# Altium PCB Multimodal.PcbDoc (part 2 of 3)
Units mil, origin at the board's own origin, x right, y up, seen from the top; angles counter-clockwise.
Board outline 1182.8 x 2149.26 mil, 6 copper layers (L1_TOP, L2_GND, L3_Signal, L4_PWR, L5_GND, L6_BOTTOM), stack 44.646 mil thick; 156 components, 97 nets, 528 pads, 619 vias.
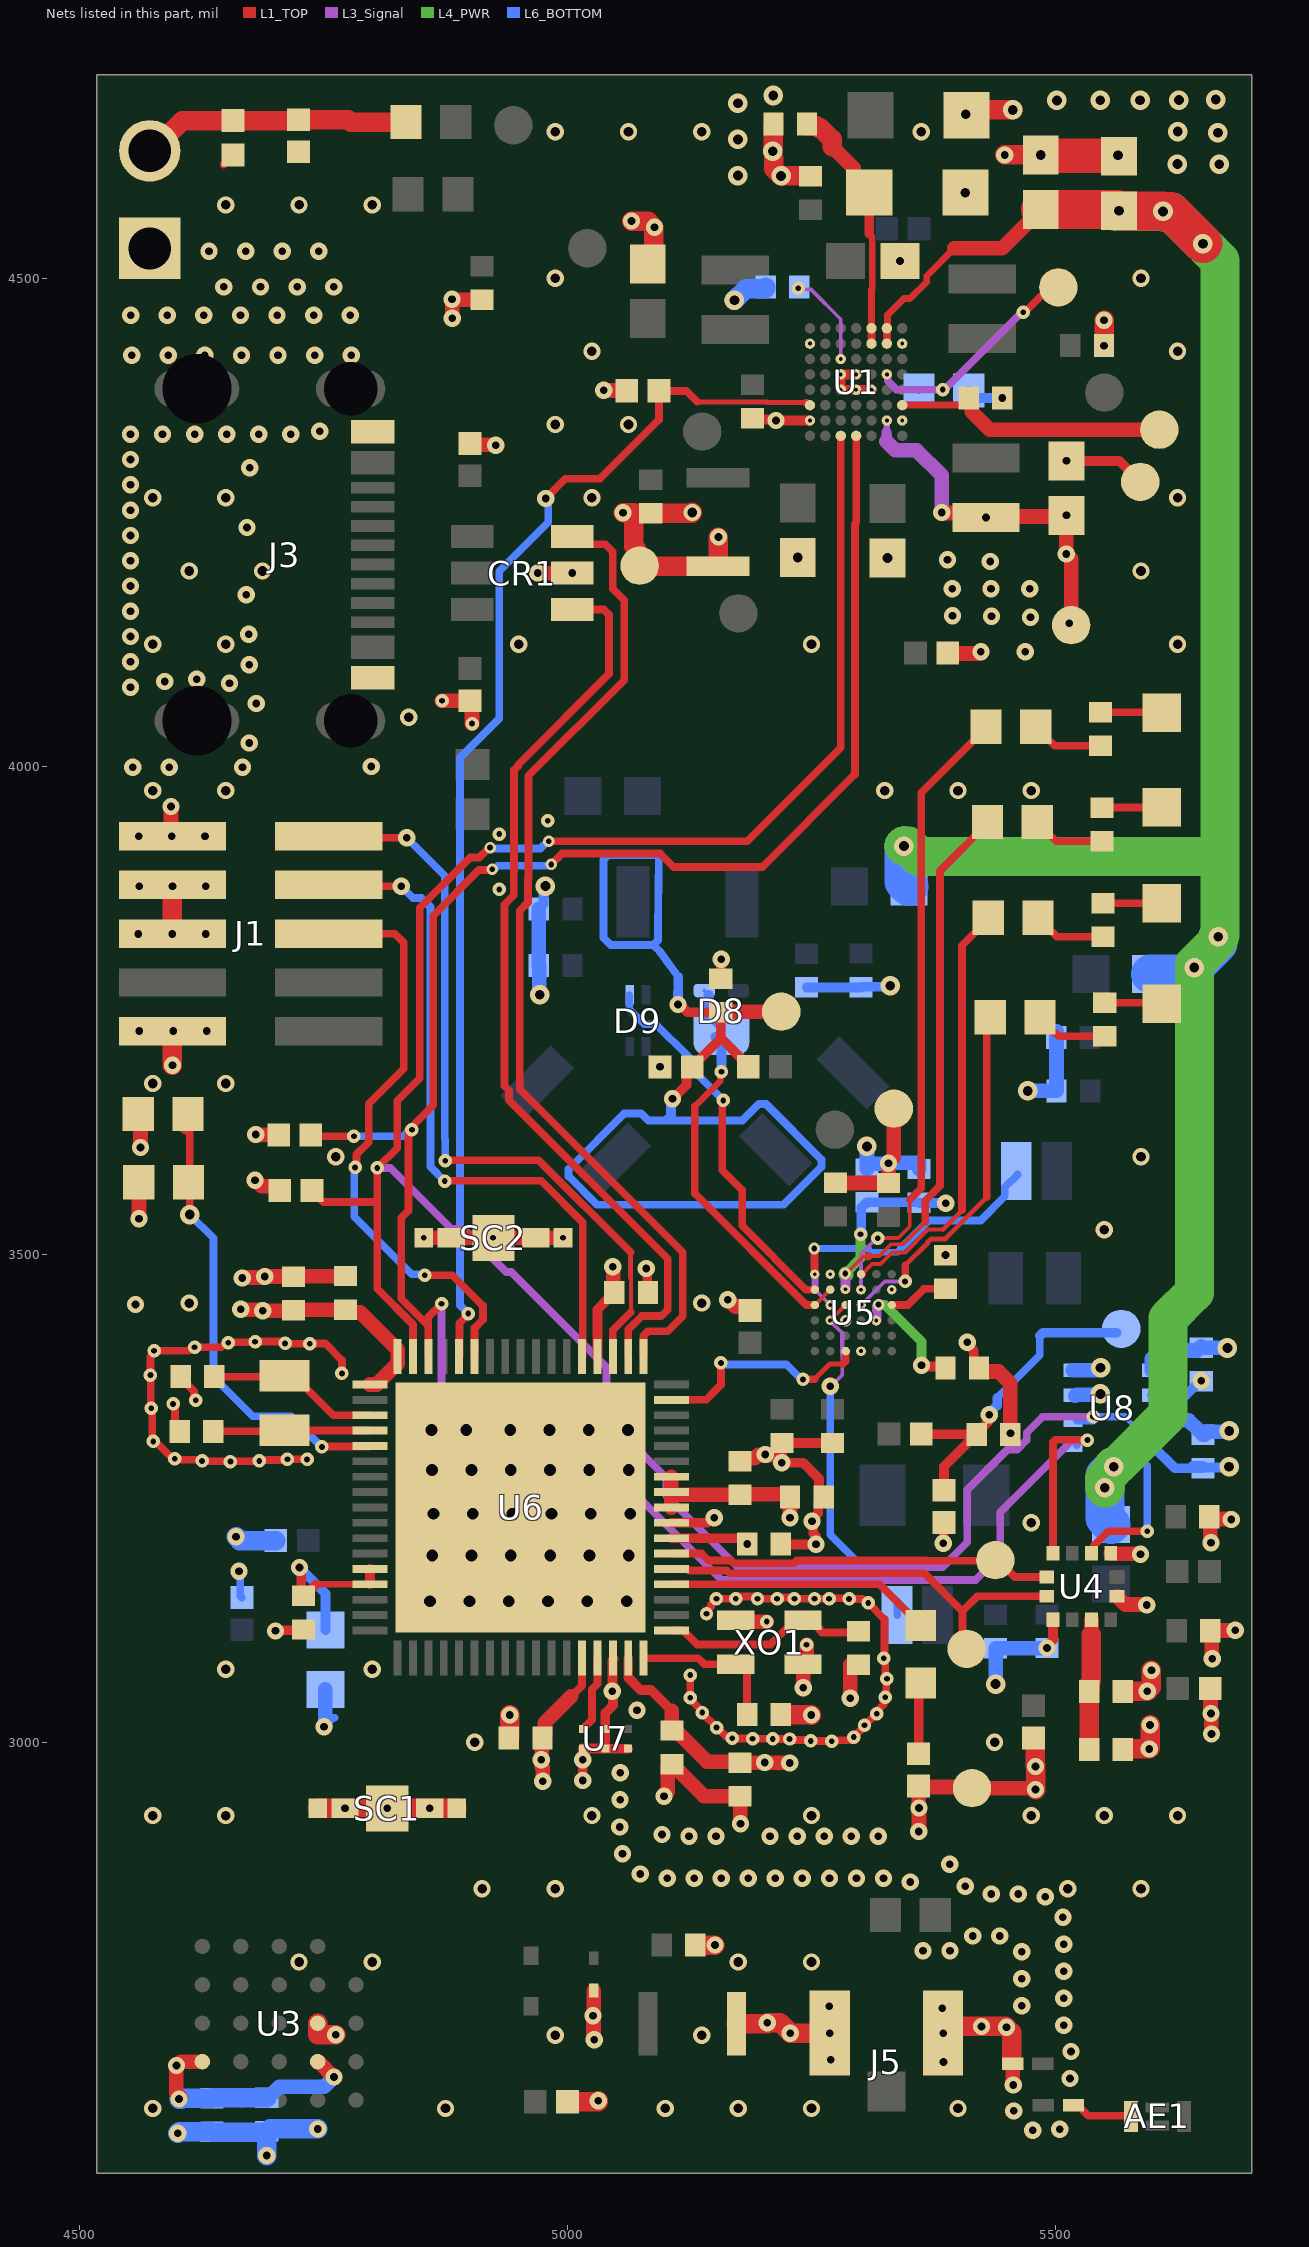
[diagram p6: the nets of this part, all layers, seen from the top]

## Via types
v1: diameter 17.72, hole 7.87, L1_TOP to L6_BOTTOM, tented both sides, 216 vias
v2: diameter 13.78, hole 5.91, L1_TOP to L6_BOTTOM, tented both sides, 93 vias
v3: diameter 17.72, hole 9.84, L1_TOP to L6_BOTTOM, 66 vias
v4: diameter 9.84, hole 3.94, L1_TOP to L2_GND, tented top, 49 vias
v5: diameter 20, hole 10, L1_TOP to L6_BOTTOM, tented both sides, 48 vias
v6: diameter 17.72, hole 7.87, L1_TOP to L6_BOTTOM, 46 vias
v7: diameter 9.84, hole 3.94, L2_GND to L3_Signal, tented top, 40 vias
v8: diameter 20, hole 12, L1_TOP to L6_BOTTOM, tented both sides, 30 vias
v9: diameter 11.81, hole 5.91, L3_Signal to L4_PWR, 20 vias
v10: diameter 11.81, hole 5.91, L1_TOP to L6_BOTTOM, tented both sides, 5 vias
v11: diameter 9.84, hole 3.94, L1_TOP to L2_GND, tented both sides, 3 vias
v12: diameter 17.72, hole 9.84, L1_TOP to L6_BOTTOM, tented both sides, 3 vias

## Nets (pads, with @x,y where several pads share a name; then routed paths per layer and width w, separated by ;. In a path a pad name is that pad's centre, name@x,y a point inside that pad or via, vN(x,y) a via of type N, cw(c..) or ccw(c..) an arc to the next point about the centre after c; other vN are vias at no path point) (continued)
3V3D: 3V3D.1 C2.1 C14.1 C16.1 C17.1 C35.1 C36.1 C37.1 C38.1 C40.1 C42.1 C43.1 C48.1 C49.1 C58.1 C60.1 C61.1 FB5.1 J1.01 L9.2 R6.2 R8.2 R9.2 R15.2 R19.2 R20.2 R24.2 R31.2 R32.2 R36.2 U1.B7 U3.B4 U3.E4 U5.C3 U5.C5 U6.1 U6.30 U6.33 U6.41 U6.43 U6.44 U6.45 U6.55 U6.68 U8.2 U8.6 U8.8 | length 2376.1
  L1_TOP w7: R20.2@4560.29,3643.59 R20.2@4562.63,3641.25
  L1_TOP w7.87: U3.B4@4744.04,2672.89 U3.B4@4745.03,2672.89 ; C35.1@4974.01,3004.1 C35.1@4976.91,3006.99
  L1_TOP w8: 5003.94,3047.24 5014.97,3058.28 U6.30@5014.97,3086.24
  L1_TOP w10: U6.55@5030.72,3395.05 5030.72,3443.49 5041.24,3454.01 5042.62,3454.01 5048.05,3459.45 C40.1@5048.05,3460.82 ; U6.33@5062.22,3086.24 5062.22,3066.45 5074.99,3053.67 5085.59,3053.67 5106.97,3032.29 ; U6.41@5106.39,3209.15 5178.6,3209.15 5184.03,3203.72 v1(5184.03,3203.1)
  L1_TOP w15: v1(4562.63,3609.34) R20.2@4562.63,3641.25 ; v1(4593.83,3958.67) 4593.83,3929.85 J1.01@4595.27,3928.4 ; v1@4603.9,2636.29 4599.36,2640.84 v1(4599.36,2668.95) 4600.09,2668.95 4604.03,2672.89 U3.E4@4625.73,2672.89 ; v1(4665.32,3443.63) 4665.84,3443.11 4686.24,3443.11 4686.65,3442.7 v1@4687.86,3442.7 ; v1(4679.86,3575.92) 4680.59,3575.92 4686.84,3569.67 4701.16,3569.67 4701.16,3569.48 R32.2@4705.27,3565.36 ; v1(4680.59,3622.64) 4680.84,3622.39 4703.8,3622.39 R31.2@4704.05,3622.14 ; v1(4687.86,3442.22) 4718.89,3442.22 C58.1@4719.37,3442.7 4719.67,3443 4772.43,3443 C37.1@4772.72,3443.3 4775.66,3440.36 4787.61,3440.36 4826,3401.98 4826,3388.13 4804.5,3366.63 U6.1@4797.57,3366.63 ; U3.B4@4745.03,2672.89 v1(4760.78,2657.14) ; v1@4973.02,2982.16 4973.73,2981.45 4973.73,2975.15 4974.7,2974.18 v1(4974.7,2960.03) ; v1(4973.21,2982.16) 4973.73,2982.68 4973.73,3003.82 C35.1@4974.01,3004.1 ; C35.1@4976.91,3006.99 4976.91,3020.21 5003.94,3047.24 ; v1(5037.12,4385.13) 5037.37,4384.88 5060.34,4384.88 R8.2@5060.59,4384.63 ; v1(5046.39,3487.19) 5046.91,3486.67 5046.91,3461.96 C40.1@5048.05,3460.82 ; U6.43@5106.39,3240.65 U6.44@5106.39,3256.4 ; U6.45@5106.39,3272.14 U6.44@5106.39,3256.4 ; 5106.97,3032.29 C43.1@5106.97,3012.09 5109.9,3009.16 5114,3009.16 5142.96,2980.2 C42.1@5175.18,2980.2 ; v1(5164.02,3453.5) 5164.75,3453.5 5171.82,3446.43 5182.68,3446.43 5186.8,3442.32 R24.2@5186.99,3442.32 ; C36.1@5176.75,3253.61 5109.18,3253.61 U6.44@5106.39,3256.4 ; C36.1@5176.75,3254.16 5218.56,3254.16 C2.1@5218.72,3254.33 ; C42.1@5177.22,2979.27 v1(5202.14,2979.27) 5202.36,2979.05 5227.34,2979.05 v1(5227.56,2978.83) ; v1(5227.9,3230.22) C2.1@5227.93,3251.16 ; v1(5383.25,4259.93) 5383.77,4259.41 5424,4259.41 v1(5428.7,4254.71) 5429.8,4255.82 5510.06,4255.82 C14.1@5510.85,4256.61 ; R9.2@5389.64,4115.75 5393.52,4115.75 5393.76,4115.51 5421.14,4115.51 5422.76,4117.14 v1(5423.5,4117.14) ; v1(5511.17,4256.93) C14.1@5510.85,4256.61 ; v1(5514.1,4146.32) 3V3D.1@5515.91,4144.51 5515.91,4212.3 v1(5510.85,4217.36) C14.1@5510.85,4256.61 ; R36.2@5658.29,3054.97 5658.76,3054.5 5658.76,3030.1 5659.53,3029.33 5659.53,3008.85 v1(5659.82,3008.56)
  L1_TOP w20: R6.2@4999.95,2631.85 5031.65,2631.85 v1(5031.65,2632.83)
  L3_Signal w7: 5327.07,4342.19 5327.07,4353.94 5327.02,4354 v4(5327.22,4354.19)
  L3_Signal w10: v9(5284.63,3480.32) 5284.72,3480.22 v7(5284.72,3464.16) ; 5326.86,4332.63 5326.86,4342.29
  L3_Signal w15: 5326.86,4332.63 5335.65,4323.84 5357.46,4323.84 5383.25,4298.04 v1(5383.25,4259.93)
  L4_PWR w10: v9(5284.63,3480.32) 5300.28,3495.97 v2(5300.28,3520.44)
  L4_PWR w15: v9@5285.01,3479.85 v9@5285.58,3479.27
  L6_BOTTOM w7.87: C16.1@4635.78,2635.44 C16.1@4635.78,2635.96 ; v1(4663.39,3175.2) 4664.86,3173.72 4664.86,3149.9 R19.2@4666.34,3148.43 ; v1@4751.97,3017.36 4759.76,3025.15 4761.37,3025.15
  L6_BOTTOM w10: v2(5300.28,3520.44) 5301,3521.17 5301,3547.78 5305.76,3552.54 C48.1@5306.74,3552.54 ; C48.1@5306.74,3553.22 5360.33,3553.22 C49.1@5360.33,3552.93 ; C49.1@5360.21,3552.93 C49.1@5360.33,3552.93 ; v1(5387.45,3552.23) 5387.1,3552.58 5360.68,3552.58 C49.1@5360.33,3552.93
  L6_BOTTOM w15: C17.1@4691.88,2635.96 4693.26,2635.96 4704.55,2647.25 4750.63,2647.25 4760.52,2657.14 v1(4760.78,2657.14) ; v1(4750.47,3015.86) v1@4751.36,3016.75 ; v1@4751.97,3017.36 v1@4751.36,3016.75 ; FB5.1@4751.97,3054.15 4751.97,3018.09 4750.99,3017.12 v1@4751.36,3016.75 ; U8.2@5520.29,3355.08 5521.17,3355.96 5544.96,3355.96 v5(5545.92,3356.91) ; U8.6@5598.42,3330.1 5636.16,3330.1 C61.1@5646.72,3319.54 ; U8.8@5598.42,3381.28 5598.42,3392.66 5607.21,3401.45 5644.9,3401.45 5649.21,3405.76 5650.78,3404.19 5675.85,3404.19 v5(5676.05,3403.99) ; C61.1@5651.03,3315.23 5652.53,3315.23 5655.34,3318.04 5677.07,3318.04 v5(5678.03,3319)
  L6_BOTTOM w20: v1(4602.1,2634.65) 4604.47,2634.65 4605.26,2635.44 C16.1@4635.78,2635.44 ; C16.1@4635.78,2635.96 C17.1@4691.88,2635.96 ; v1(4660.43,3210.63) 4664.37,3206.69 R15.2@4701.18,3206.69
  other v1: 5659.24,3029.62 4560.74,3928.22 4594.71,3928.22 4628.67,3928.22 5469,4117.38 5474.34,4152.57 5394.44,4154.24 5434.31,4153.74 5394.11,4181.76 5433.89,4181.76 5473.68,4181.76 5433.14,4209.79 5389.27,4211.62
  other v4: 5285.23,3432.13 5284.72,3464.16
  other v7: 5285.23,3432.13 5327.22,4354.19
  other v9: 5285.23,3432.13
5V_LED: C9.1 C10.1 FB1.2 FB2.2 FB3.2 U1.B1 U1.B2 | length 2369.7
  L1_TOP w7: U1.B1@5327.15,4448.63 5327.85,4449.32 5327.85,4462.07 5344.89,4479.11 5350.98,4479.11 5368.01,4496.15 5368.01,4502.24 5396.49,4530.72
  L1_TOP w8: U1.B2@5327.15,4432.88 U1.B1@5327.15,4448.63
  L1_TOP w15: 5396.49,4530.72 5445.32,4530.72 5472.4,4557.8 5473.98,4557.8 C10.1@5484.78,4568.6
  L1_TOP w40: C10.1@5484.78,4570.18 5563.62,4570.18 v5(5564.85,4568.95) 5609.42,4568.95 v5(5610.05,4568.33) 5617.89,4568.33 v5(5650.96,4535.25)
  L4_PWR w40: v5(5344.63,3918.18) 5349.5,3918.18 5360.22,3907.46 5668.44,3907.46 ; v5(5550.42,3260.76) 5550.42,3270.98 5559.56,3280.12 v5(5559.56,3282.35) ; v5@5562.18,4568.33 v5(5610.05,4568.33) 5610.69,4567.68 5618.54,4567.68 v5(5650.96,4535.25) 5668.44,4517.78 5668.44,3907.46 ; v5@5564.71,3285.27 5615.24,3335.8 5615.24,3434.14 5642.11,3461.02 5642.11,3797.22 5666.58,3821.69 v5(5666.58,3825.19) 5668.44,3827.06 5668.44,3907.46
  L6_BOTTOM w40: v5(5344.63,3918.18) 5344.63,3881.93 FB3.2@5349.73,3876.82 ; FB2.2@5556.95,3223.09 5550.42,3229.62 5550.42,3273.2 v5(5559.56,3282.35) ; FB1.2@5597.08,3786.99 5635.39,3786.99 5666.58,3818.18 v5(5666.58,3825.19)
  other v5: 5642.11,3793.72
ACC_INT1: 1.1 U4.5 U6.40 | length 397.3
  L1_TOP w7.87: U6.40@5106.39,3193.4 5137.59,3193.4 5144.76,3186.23 5167.53,3186.23 5170.34,3183.42 5232.14,3183.42 5234.95,3186.23 5367.14,3186.23 5367.31,3186.06 5437.74,3186.06 1.1@5438.37,3186.7 5440.82,3186.7 5458.09,3169.43 U4.5@5490.88,3169.43
ACC_INT2: 2.1 U4.6 U6.39 | length 449.1
  L1_TOP w7.87: U6.39@5106.39,3177.66 5106.47,3177.58 5122.82,3177.58 5124.4,3176 5163.29,3176 5166.1,3173.19 5365.71,3173.19 5404.57,3134.34 ; 2.1@5408.86,3095.82 5404.57,3100.11 5404.57,3134.34 ; U4.6@5490.88,3149.74 5419.98,3149.74 5404.57,3134.34
ACC_VREG_OUT: C51.1 C52.1 U4.9 | length 133.8
  L1_TOP w15: 5536.73,3110.34 U4.9@5536.73,3125.59
  L1_TOP w20: C52.1@5534.47,2992.73 C51.1@5534.47,3052.28 5534.91,3052.71 5534.91,3060.81 5536.73,3062.63 5536.73,3110.34
ADPD_INTR: U5.C1 U6.50 | length 232.4
  L1_TOP w5: 5253.02,3371.82 5268.88,3387.69 5282.02,3387.69
  L1_TOP w7.87: U6.50@5106.39,3350.89 5141.94,3350.89 5152.64,3361.58 5157.19,3366.13 v2(5157.19,3388.68) ; v2(5241.27,3371.82) 5253.02,3371.82 ; 5282.02,3387.69 5284.95,3390.61 U5.C1@5284.95,3400.78
  L6_BOTTOM w7.87: v2(5157.19,3388.68) 5158.7,3387.16 5224.08,3387.16 5239.43,3371.82 v2(5241.27,3371.82)
BAT+: C6.1 J4.2 U1.C1 U1.C2 | length 256.5
  L1_TOP w6: 5309.14,4545.37 5311.23,4543.28
  L1_TOP w7: 5311.23,4543.28 5312.19,4542.32 5312.19,4488.79 5311.4,4488.01 U1.C1@5311.4,4449.17
  L1_TOP w8: U1.C2@5311.4,4432.88 U1.C1@5311.4,4448.63
  L1_TOP w10: 5309.14,4545.37 J4.2@5309.14,4587.63
  L1_TOP w15: C6.1@5245.39,4658.05 5245.39,4656.67 C6.1@5248.32,4653.74 ; 5271,4634.8 5293.02,4612.78 5293.02,4603.75 5301.35,4595.42 J4.2@5306.34,4595.42
  L1_TOP w20: C6.1@5245.82,4656.24 5255.04,4656.24 5257.54,4653.74 5259.28,4653.74 5271,4642.02 5271,4634.8
BIA1: C21.2 J6.1 | length 64.1
  L1_TOP w7.87: C21.2@5546.05,4055.24 J6.1@5610.13,4055.24
BIA2: C22.2 J7.1 | length 62.8
  L1_TOP w7.87: C22.2@5547.58,3957.61 J7.1@5610.35,3957.61
BIA3: C25.2 J8.1 | length 60.3
  L1_TOP w7.87: C25.2@5548.52,3859.59 J8.1@5608.78,3859.59
BIA4: C27.2 J9.1 | length 64.7
  L1_TOP w7.87: C27.2@5550.37,3757.69 5608.5,3757.69 5610.13,3756.07 5613.33,3756.07 J9.1@5614.05,3756.79
BLUE_CO2: D5.1 U5.B3 U5.C4 | length 363.2
  L1_TOP w4: U5.B3@5269.2,3432.28 U5.C4@5284.95,3448.03
  L3_Signal w3.89: v1(5269.1,3364.89) 5269.84,3364.89 5281.42,3376.48 5281.42,3396.61
  L3_Signal w4: v4(5268.97,3432.28) 5268.97,3431.65 5280.92,3419.7 5281.42,3419.2
  L3_Signal w5: 5281.42,3396.61 5281.42,3419.2
  L6_BOTTOM w7.87: v1(5269.1,3364.89) 5269.1,3212.79 5337.65,3144.24 D5.1@5337.65,3130.46
  other v7: 5268.97,3432.28
BLUE_O2: D4.1 U5.A6 U5.B4 | length 313.1
  L1_TOP w4: v10(5252.72,3505.91) v10@5253.09,3505.54 ; U5.A6@5253.09,3479.89 U5.A6@5253.46,3479.52
  L1_TOP w7.87: U5.A6@5253.09,3479.89 v10@5253.09,3505.54
  L3_Signal w4: 5253.46,3463.7 5269.14,3448.02 v7(5269.2,3448.02)
  L3_Signal w7: 5253.46,3463.7 v7@5253.46,3479.52
  L6_BOTTOM w7: v10(5252.72,3505.91) 5307.72,3505.91 5311.59,3502.05 5337.57,3502.05 5341.43,3505.91
  L6_BOTTOM w7.87: 5341.43,3505.91 5370.15,3534.62 5423.2,3534.62 5448,3559.42 5448,3568.6 D4.1@5461.08,3581.68
  other v4: 5269.2,3448.02 5253.29,3479.54
  other v7: 5253.29,3479.54
BOOT0_MCU: R20.1 R21.2 U6.5 | length 470.6
  L1_TOP w7.87: R20.1@4606.45,3628.33 R20.1@4608.29,3626.48 ; v5(4613.13,3540.7) R20.1@4613.13,3641.74 ; v2(4748.39,3302.6) 4748.91,3303.12 4797.05,3303.12 U6.5@4797.57,3303.64
  L6_BOTTOM w7.87: v5(4613.13,3540.7) 4637.4,3516.44 4637.4,3373.98 4677.42,3333.96 4717.03,3333.96 v2(4748.39,3302.6)
DISP_LED: D13.2 U6.38 | length 272.9
  L1_TOP w7.87: U6.38@5106.39,3161.91 5319.64,3161.91 D13.2@5361.8,3119.74
EXCN: R39.2 U5.D4 | length 370.3
  L1_TOP w3.89: R39.2@5432.96,3741.28 R39.2@5432.96,3742.78
  L1_TOP w4: U5.D4@5300.7,3448.03 5300.77,3448.03 v7(5301.1,3448.36)
  L1_TOP w5: 5345.86,3488.58 5368.77,3511.49 5368.77,3512.06 5372.54,3515.83 5387.05,3515.83 5429.55,3558.33
  L1_TOP w7.87: v2(5345.86,3472.18) 5345.86,3488.58 ; 5429.55,3558.33 5429.55,3737.87 R39.2@5432.96,3741.28
  L3_Signal w3.89: v7(5301.1,3448.36) 5324.92,3472.18 v2(5345.86,3472.18)
  other v4: 5301.1,3448.36
EXCP: R17.2 U5.D5 | length 642.5
  L1_TOP w3.89: v2(5317.76,3516.38) 5318.12,3516.74 5338.87,3516.74 5350.58,3528.44 5350.58,3555.78 ; R17.2@5428.64,4038.83 R17.2@5428.64,4040.33
  L1_TOP w7.87: 5350.58,3555.78 5362.5,3567.69 5362.5,3972.68 R17.2@5428.64,4038.83
  L3_Signal w3.89: v7@5300.7,3463.78 5300.63,3463.84 5300.63,3500.5 5316.52,3516.38 v2(5317.76,3516.38)
  other v4: 5300.63,3463.73
  other v7: 5300.63,3463.73
GD_BIAS: C1.1 R1.1 R2.2 TP2.1 | length 335.8
  L1_TOP w10: R1.1@5362.49,3315.7 5418.3,3315.7 5430.83,3328.22 5430.83,3334.18 v1(5432.12,3335.46) ; R2.2@5385.82,3258.33 5385.82,3282.69 5411.66,3308.54 5413.9,3308.54 5419.33,3313.97 C1.1@5419.33,3315.35
  L6_BOTTOM w8: 5440.14,3352.96 5483.88,3396.69 5483.88,3416.5
  L6_BOTTOM w10: v1(5432.12,3335.46) 5432.12,3337.16 5440.14,3345.18 5440.14,3352.96 ; 5483.88,3416.5 5487.01,3419.63 TP2.1@5562.37,3419.63
GD_BIAS_2: C18.1 R12.1 R13.2 TP1.1 | length 1259.1
  L1_TOP w10: v1(5107.54,3659.25) 5121.79,3673.5 5121.79,3685.9 R13.2@5127.9,3692.02 ; v1(5113.23,3755.95) 5115.02,3755.95 5122.95,3748.02 C18.1@5157.02,3748.02 ; R13.2@5127.9,3692.21 5157.02,3721.33 ; C18.1@5157.29,3748.3 C18.1@5157.02,3748.02 ; R12.1@5185.11,3692.09 5178.5,3698.71 5178.5,3699.85 5157.02,3721.33 ; TP1.1@5218.66,3748.3 TP1.1@5218.93,3748.57 ; 5157.02,3721.33 C18.1@5157.02,3748.02
  L1_TOP w15: C18.1@5157.29,3748.3 TP1.1@5218.66,3748.3
  L6_BOTTOM w8: 5092.68,3829.38 5093.45,3908.89 5041.6,3908.89 5036.91,3904.21 5036.91,3824.27 5044.4,3816.78 5087.89,3816.78 ; 5092.79,3829.38 5092.58,3829.17 5092.58,3821.47 5087.89,3816.78 ; 5106.06,3642.86 5100.2,3637 ; 5113.41,3784.35 5094.91,3809.77 5087.89,3816.78 ; 5100.2,3637 5178.95,3637 5195.84,3653.89 5203.29,3653.89 5260.19,3596.99 5260.19,3589.54 5221.3,3550.65 5030.29,3550.65 5001.13,3579.81 5001.13,3587.27 5058.02,3644.16 5075.53,3644.16 5082.69,3637 5100.2,3637
  L6_BOTTOM w10: 5106.06,3642.86 5106.06,3657.77 v1(5107.54,3659.25) ; v1(5113.23,3755.95) 5113.41,3784.35
GND: C1.2 C2.2 C3.2 C4.2 C5.2 C6.2 C7.2 C8.2 C9.2 C10.2 C11.2 C12.2 C13.2 C14.2 C15.2 C16.2 C17.2 C18.2 C19.2 C20.2 C23.2 C24.2 C26.2 C28.2 C29.2 C30.2 C31.2 C32.2 C33.2 C34.2 C35.2 C36.2 C37.2 C38.2 C40.2 C41.2 C42.2 C43.2 C45.2 C46.2 C47.2 C48.2 C49.2 C50.2 C51.2 C52.2 C53.2 C54.2 C55.2 C56.2 C57.2 C58.2 C60.2 C61.2 C62.2 C64.2 CR1.2 CR3.2 D1.2 GND.1 J1.03 J1.05 J1.09 J2.1 J3.A1/B12 J3.B1/A12 J4.1 J5.2 J5.3 J11.2 L5.2 R2.1 R5.1 R7.1 R13.1 R21.1 R22.1 R28.1 R33.1 R38.1 SC1.S1-1 SC1.S1-2 SC1.S1-3 SC1.S1-4 SC1.S1-5 SC2.S1-1 SC2.S1-2 SC2.S1-3 SC2.S1-4 SC2.S1-5 SW1.1 SW2.1 U1.A2 U1.A7 U1.C5 U1.D4 U1.D5 U1.E4 U1.E5 U1.G2 U1.G7 U3.B3 U4.1 U4.7 U4.11 U5.B6 U5.D1 U5.F5 U6.32 U6.42 U6.69 U7.2 U7.4 U7.5 U7.6 U8.1 U8.5 U8.7 XO1.2 XO1.4 | length 5508.8
  L1_TOP w7.87: J2.1@4572.04,4530.37 J2.1@4580.37,4530.37 ; v2(4595.98,3346.65) 4597.89,3344.74 4597.89,3323.53 C46.2@4602.77,3318.65 ; C45.2@4603.77,3374.65 4603.77,3373.27 4617.34,3359.71 4617.34,3352.39 v2(4619.25,3350.48) ; D1.2@4647.82,4616.33 D1.2@4657.48,4625.98 ; v1(4700.79,3114.17) v1@4701.54,3114.92 ; C41.2@4728.58,3114.92 C41.2@4729.33,3115.67 ; v2(4733.2,3289.84) 4733.07,3289.97 4713.18,3289.97 v2(4713.05,3290.1) 4712.17,3289.22 4685.19,3289.22 4683.93,3287.96 4655.07,3287.96 v2(4654.69,3287.58) 4654.31,3287.96 4626.45,3287.96 4626.26,3287.77 4624.54,3289.49 4598.7,3289.49 v2(4597.55,3290.64) 4595.42,3290.64 4576.77,3309.29 4574.64,3309.29 4574.64,3341.34 4573.2,3342.78 4573.2,3375.82 v2(4572.76,3376.26) 4572.76,3394.85 4574.71,3396.8 4574.71,3400.42 4573.96,3401.17 4611.94,3401.17 4615.33,3404.56 4619.89,3404.56 4619.94,3404.61 4645.18,3404.61 4649.94,3409.36 v2(4652.5,3409.36) 4653.04,3409.9 4679.38,3409.9 4680.04,3410.56 4706.11,3410.56 4708.02,3408.65 v2(4710.73,3408.65) 4710.9,3408.48 4735.69,3408.48 v2(4735.86,3408.31) 4736.21,3408.65 4751.7,3408.65 4768.95,3391.41 v2(4768.95,3377.92) ; R28.1@4900,4330.54 R28.1@4901.87,4332.4 ; C35.2@4939.97,3004.46 C35.2@4940.77,3005.27 ; v1@5026.69,2695.94 v1(5027.3,2695.32) ; v1@5026.69,2718.02 5025.44,2719.27 v1@5026.97,2720.81 ; CR3.2@5026.97,2745.61 CR3.2@5027.05,2745.69 ; U6.32@5046.47,3086.24 U6.32@5047.35,3085.36 ; v2(5125.76,3068.95) 5125.76,3044.26 5138.05,3031.98 v2(5138.05,3030.46) ; v2@5138.23,3030.28 5138.23,3029.93 5152.69,3015.46 v2(5152.69,3015.11) 5153.34,3015.11 5162.46,3006 5167.05,3006 5169.08,3003.97 5189.41,3003.97 v2(5189.63,3003.75) ; v2(5142.42,3131.72) 5142.42,3134.28 5146.91,3138.77 5146.91,3141.08 5152.98,3147.15 v2(5172.47,3147.15) ; v2@5172.42,3149.26 5172.53,3149.37 v2@5194.49,3149.37 ; v2@5189.68,3003.8 5189.84,3003.64 5210.06,3003.64 v2(5210.17,3003.53) 5227.5,3003.47 5228.53,3002.43 5248.1,3002.43 5249.19,3001.34 5270.61,3001.34 v2(5270.72,3001.23) 5271.63,3002.15 5290.02,3002.15 5304.27,3016.4 v2(5304.27,3017.63) 5304.7,3017.63 5316.54,3029.46 5317.33,3029.46 5317.33,3032.38 5323.77,3038.82 5323.77,3044.45 5326.4,3047.08 5326.4,3064.45 v2(5327.22,3065.27) 5325.63,3066.86 5325.63,3084.56 v2(5324.05,3086.15) 5324.68,3086.78 5324.68,3126.28 v2(5308.09,3142.87) 5306.01,3142.87 5301.94,3146.93 v2(5288.44,3146.93) 5287.84,3147.53 5269.32,3147.53 5268.35,3148.51 v2@5268.12,3148.29 ; v2(5194.66,3147.15) v2(5214.66,3147.15) ; v2@5215.18,3148.35 5231.94,3148.35 v2@5232.47,3147.83 ; v2(5232.47,3147.15) v2(5253.01,3147.15) ; XO1.4@5241.05,3071.58 5241.05,3082.57 XO1.4@5244.94,3086.46 ; v2@5252.71,3148.13 5253.7,3147.15 v2(5267.97,3147.15)
  L1_TOP w10: R21.1@4560.78,3573.85 R21.1@4561.05,3573.59 ; v1@4701.54,3114.92 C41.2@4728.58,3114.92 ; C37.2@4772.43,3477.41 C37.2@4772.72,3477.71 ; v1(5015.51,2960.88) 5015.57,2960.94 5015.57,2982.1 v1(5015.63,2982.16) 5015.63,2993.68 U7.5@5038.78,2993.68 ; v1(5045.87,3052.36) 5046.54,3051.68 5046.54,3037.94 5038.78,3030.18 5038.78,2993.48 U7.6@5061.89,2993.48 ; v1@5046.17,3052.66 5046.17,3084.18 U6.32@5047.35,3085.36 ; v1(5080.73,3485.35) 5081.59,3484.48 5081.59,3461.69 C40.2@5082.46,3460.82 ; U6.42@5106.39,3224.9 5143.29,3224.9 5148.39,3230 v1(5150.48,3230) ; C18.2@5157.02,3782.43 5157.2,3782.61 5157.2,3802.11 v1(5157.37,3802.28) ; C11.2@5189.74,4356.35 5190.84,4355.25 5212.44,4355.25 v1(5213.55,4354.14) v4(5248.41,4354.14) ; C38.2@5218.44,3203.1 5218.77,3202.77 v1@5254.26,3202.77 ; C47.2@5219.62,3306.73 5219.62,3288.74 v1(5219.62,3286.53) 5241.27,3286.53 5257.76,3270.04 5257.76,3247.02 5257.98,3246.8 5256.93,3245.76 5256.93,3235.07 5250.38,3228.52 v1(5250.38,3226.43) 5251.85,3224.95 5251.85,3213.69 5254.46,3211.08 5254.46,3203.09 v1(5254.59,3202.96) ; C47.2@5219.62,3306.73 C31.2@5271.46,3306.71 ; C29.2@5274.54,3573.15 C29.2@5274.62,3573.06 ; v4(5295.66,4401.39) v4(5279.91,4401.39) v4(5279.91,4385.64) v4(5295.66,4385.64) v4(5311.4,4385.64) ; C34.2@5328.85,3573.06 C34.2@5328.93,3572.98 ; v1(5385.06,3204.05) 5385.44,3204.42 5385.44,3224.7 R2.1@5385.82,3225.08 ; C24.2@5387.02,3498.96 5387.19,3499.14 v1(5387.19,3499.31) ; v1(5409.53,3409.98) 5409.53,3407.89 5416.18,3401.24 5416.18,3389.12 C23.2@5421.61,3383.69 ; C1.2@5453.74,3315.35 v1(5453.74,3316.73) ; v1(5491.28,3096.6) 5491.28,3098.69 5497.36,3104.77 U4.7@5497.36,3125.59 ; v1(5511.17,4312.75) 5565.3,4312.75 GND.1@5586.79,4291.27 GND.1@5592.86,4291.27
  L1_TOP w15: v1(4561.05,3536.41) R21.1@4561.05,3573.59 ; v1(4666.77,3475.7) 4667.29,3476.22 4688.1,3476.22 4689.15,3477.27 v1(4689.89,3477.27) 4689.97,3477.19 4719.29,3477.19 C58.2@4719.37,3477.11 ; C58.2@4719.67,3477.41 C37.2@4772.43,3477.41 ; v2(4852.65,3516.81) 4852.7,3516.76 4880.72,3516.76 SC2.S1-4@4880.81,3516.76 SC2.S1-4@4880.81,3516.76 4923.54,3516.76 v2(4923.63,3516.85) 4967.42,3516.85 4967.51,3516.76 SC2.S1-1@4995.38,3516.76 4995.38,3516.85 v2(4995.51,3516.85) ; v2(4871.49,4067) R33.1@4900,4067 4902.2,4064.8 v2(4902.2,4043.64) ; v1(4881.59,4478.34) 4881.82,4478.1 4881.82,4459.04 v1(4882.05,4458.8) 4882.05,4477.72 4882.21,4477.87 C62.2@4912.4,4477.87 ; R28.1@4901.87,4332.4 4901.87,4331.7 4904.31,4329.25 4925.87,4329.25 v1(4926.39,4328.73) ; v1(4969.49,4197.83) v1(5004.92,4197.83) ; v1@5026.69,2695.94 v1@5026.69,2718.02 ; v1@5026.97,2720.81 CR3.2@5026.97,2745.61 ; v1(5065.47,4558.54) v1@5065.99,4558.02 ; C13.2@5081,4522.98 5084.74,4526.72 C13.2@5088.52,4526.72 ; v1@5088.3,4552.18 v1(5089.04,4552.18) v1@5088.52,4551.66 ; v1(5098.95,2944.8) 5098.95,2945.53 5102.66,2949.24 5102.66,2974.75 5111.28,2974.75 5111.28,2973.37 5139.85,2944.8 C42.2@5175.03,2944.8 ; C43.2@5106.97,2977.69 C43.2@5108.35,2977.69 ; C36.2@5176.75,3288.02 5179.68,3290.95 5191.9,3290.95 5195.38,3294.43 5201.92,3294.43 v1(5202.44,3294.95) 5202.96,3294.43 5213.92,3294.43 5219.62,3288.74 v1@5221.03,3287.32 ; C42.2@5176.92,2944.8 5177.08,2944.64 5177.08,2916.74 v1(5177.23,2916.59) ; XO1.2@5179.65,3123.7 v2(5204.03,3123.7) ; v1(5241.38,3055.8) XO1.4@5241.38,3079.88 ; XO1.4@5244.94,3086.46 v2(5244.94,3100.01) ; C29.2@5274.62,3573.06 C34.2@5328.85,3573.06 ; v1(5289.66,3045.22) 5289.66,3079.38 C19.2@5298.11,3079.38 ; C34.2@5328.93,3572.98 5328.93,3593.91 5334.26,3599.25 GND.1@5334.26,3649.21 ; R22.1@5359.63,2955.3 R22.1@5359.88,2955.05 ; v1(5359.94,2908.73) 5360.03,2908.83 5360.03,2932.74 v1(5360.13,2932.84) 5359.88,2933.09 R22.1@5359.88,2955.05 ; GND.1@5413.32,2954.41 5413.11,2954.19 5360.74,2954.19 R22.1@5359.88,2955.05 ; GND.1@5414.38,2953.09 5479.48,2953.09 5480.35,2953.09 v1@5481.41,2954.14 ; C23.2@5421.61,3383.69 5421.61,3382.8 5424.55,3379.87 5441.86,3379.87 5453.74,3367.98 v1(5453.74,3316.73) ; L5.2@5456.3,2670.27 5456.3,2649.32 v1(5456.65,2648.97) ; U4.1@5556.41,3193.59 5556.89,3193.11 5586.43,3193.11 v1(5586.95,3192.59) ; U4.11@5562.88,3149.74 5571.48,3141.15 5593.02,3141.15 v1(5593.54,3140.63) ; v1(5659.29,3204.33) 5659.29,3205.07 5658.53,3205.82 5658.53,3229.9 C53.2@5657.34,3231.1 5659.66,3228.78 5679.55,3228.78 v1(5680.07,3228.26) ; v1(5660.39,3085.58) 5659.87,3086.1 5659.87,3112.93 C50.2@5658.44,3114.36 5658.64,3114.56 5683.87,3114.56 v1(5684.07,3114.76)
  L1_TOP w20: v1(4595.27,3693.55) J1.09@4595.27,3728.4 ; J1.05@4595.27,3828.4 J1.03@4595.27,3878.4 ; U3.B3@4744.04,2712.26 4744.04,2700.44 v1(4762.68,2700.44) ; SC1.S1-5@4744.16,2932.39 v1(4772.12,2932.39) v1(4815.42,2932.39) v1(4858.73,2932.39) SC1.S1-1@4886.68,2932.39 ; C35.2@4940.77,3005.27 v1(4940.77,3028.06) ; v1(5056.88,4259.74) 5057.01,4259.61 5067.86,4259.61 ; v1@5065.99,4558.02 5082.46,4558.02 v1@5088.3,4552.18 ; GND.1@5073.9,4205.43 5070.2,4209.13 5070.2,4222.83 5067.86,4225.17 5067.86,4259.17 C7.2@5085.29,4259.17 ; C7.2@5086.17,4259.17 5127.05,4259.17 v12(5127.81,4259.94) ; GND.1@5086.6,4204.85 SW1.1@5154.18,4204.85 ; C13.2@5088.52,4526.72 v1@5088.52,4551.66 ; C26.2@5130.89,2792.39 v1(5151.09,2792.39) ; SW1.1@5154.64,4208.23 v1(5154.64,4234.71) ; SW2.1@5173.14,2711.88 v1@5204.63,2711.88 ; v1(5204.63,2712.86) 5217.56,2712.86 v1(5228.28,2702.14) v1(5268.66,2702.14) ; v5@5210.36,4633.61 5210.55,4633.8 5210.55,4657.62 C6.2@5210.98,4658.05 ; v5@5211.47,4622.11 5211.47,4611.95 v5(5218.76,4604.66) 5248.54,4604.66 C8.2@5248.87,4604.33 ; C20.2@5218.52,3028.51 5249.85,3028.51 v1(5249.85,3027.99) ; v1(5384.8,2702.14) 5391.67,2709.01 v1(5424.17,2709.01) 5448.78,2709.01 v1(5449.76,2708.02) 5455.02,2702.77 5455.02,2671.56 L5.2@5455.95,2670.62 L5.2@5456.3,2670.27 ; J11.2@5408.93,4666.9 5414.36,4672.33 v5(5456.14,4672.33) ; v1(5448.01,4626.22) 5484.57,4626.22 v5(5484.78,4626) ; R38.1@5477.51,3004.5 5477.71,3004.5 5479.32,3002.88 5479.32,2975.44 v1(5479.48,2975.29) 5479.48,2953.09 v1(5479.48,2951.66) ; v1(5549.62,4430.8) v1(5549.62,4456.91) ; C52.2@5568.88,2992.73 5568.88,2992.79 5569.32,2993.22 v1(5595.97,2993.22) 5596.77,2994.02 v1(5596.77,3017.8) ; C51.2@5568.88,3052.28 v1(5594,3052.28) 5598.19,3056.46 v1(5598.19,3073.71)
  L1_TOP w35: v5(5484.78,4626) 5485.4,4625.39 C9.2@5564.23,4625.39 ; v5(5563.91,4625.92) 5563.91,4625.71 C9.2@5564.85,4624.78
  L6_BOTTOM w10: C56.2@4970.65,3853.85 4975.53,3858.72 4975.53,3875.29 v5(4977.44,3877.2) ; C55.2@5245.04,3773.66 5245.34,3773.36 5300.53,3773.36 5300.84,3773.06 5301.9,3774.12 5329.63,3774.12 v5(5330.69,3775.18) ; R7.1@5411.13,4384.73 5418.66,4377.21 v1(5445.47,4377.21) ; v5(5471.48,3667.28) v5@5471.57,3667.37 ; C28.2@5497.02,3667.37 C28.2@5497.11,3667.46 ; U8.5@5598.42,3304.51 5622.12,3280.82 C61.2@5651.03,3280.82 ; U8.7@5598.42,3355.69 5633.55,3355.69 5647.83,3369.97 C60.2@5649.21,3369.97 v1(5649.18,3370.3) ; C61.2@5640.24,3283.04 5651.1,3283.04 5652.55,3281.59 5676.98,3281.59 v5(5677.76,3282.37)
  L6_BOTTOM w15: C56.2@4970.65,3853.85 C57.2@4970.65,3795.88 4971.17,3795.36 4971.17,3766.35 v5(4971.69,3765.83) ; C48.2@5306.74,3587.63 C48.2@5306.74,3592.75 ; v5(5306.74,3610.49) C48.2@5306.74,3592.75 ; v1@5328.53,3593.87 5360.21,3593.87 C49.2@5360.21,3587.34 ; v1@5329.24,3592.75 C48.2@5306.74,3592.75 ; v5(5438.59,3059.75) C33.2@5438.59,3096.46 5438.66,3096.53 5491.21,3096.53 v1(5491.28,3096.6) ; v5@5471.57,3667.37 C28.2@5497.02,3667.37 ; C28.2@5500.99,3667.46 C30.2@5500.99,3728.38 ; U8.1@5517.71,3381.28 5542.21,3381.28 5544.77,3383.84 v5(5546.12,3383.84)
  L6_BOTTOM w20: v1(4600.79,2599.66) 4602.17,2601.04 C16.2@4635.78,2601.04 4636.21,2600.6 C17.2@4691.91,2600.6 ; v1(4691.91,2576.7) C17.2@4691.88,2601.55 4693.22,2601.52 4695.7,2603.99 v1(4744.23,2603.99) ; v5(5170.95,4477.36) 5182.6,4489.01 5202.48,4489.01 5202.91,4489.45 C64.2@5202.91,4490.83
  other v1: 5385.19,2672.51 5269.55,2674.71 5026.07,2719.91 5383.93,2727.58 5268.29,2729.78 4557.52,3448.47 5328.93,3593.18 5094.83,3692.02 4561.42,3728.81 4596,3728.81 4630.57,3728.81 4560.39,3828.08 4594.97,3828.08 4629.55,3828.08 4561.18,3877.12 4595.36,3877.12 4629.55,3877.12 4554.5,3999 4592,3999 4667,3999 4798.95,3999.59 4673.87,4023.71 4681.28,4064.31 4552.33,4081 4653.76,4084.89 4587.55,4086.68 4620.21,4089.14 4674.1,4103.93 4552.33,4106.9 4552.33,4132.8 4673.51,4135.1 4552.33,4158.7 4671,4175.72 4552.33,4184.6 4552.33,4210.5 4552.33,4236.4 4671.75,4244.52 4552.33,4262.3 4552.33,4288.2 4674.49,4305.59 4552.33,4314.1 4552.33,4340 4585.17,4340 4618,4340 4650.83,4340 4683.67,4340 4716.5,4340 4746.11,4343.23 4553.5,4421 4591,4421 4628.5,4421 4666,4421 4703.5,4421 4741,4421 4778.5,4421 4552.5,4462 4590,4462 4627.5,4462 4665,4462 4702.5,4462 4740,4462 4777.5,4462 4648,4491 4685.5,4491 4723,4491 4760.5,4491 5340.7,4517.54 4632.75,4527.5 4670.25,4527.5 4707.75,4527.5 4745.25,4527.5
  other v2: 5249.08,3001.45 5227.55,3003.42 5168.86,3004.18 5293.27,3005.44 5316.69,3029.18 5125.76,3045.78 5325.58,3046.26 5152.58,3147.15 4625.7,3288.34 4684.31,3288.34 4575.64,3308.29 4573.64,3342.34 4576.52,3401.17 4617.98,3404.65 4679.91,3410.43 4930.09,3873.76 4930.09,3930.51 4979.72,3944.17
  other v3: 4575,2625 4875,2625 5100,2625 5175,2625 5250,2625 5400,2625 4987.5,2700 5137.5,2700 4725,2775 4800,2775 5175,2775 5250,2775 4912.5,2850 4987.5,2850 5512.5,2850 5587.5,2850 4575,2925 4650,2925 5025,2925 5250,2925 5475,2925 5550,2925 5625,2925 4904.93,3000 5437.5,3000 4650,3075 4800,3075 5475,3225 4612.5,3450 5137.5,3450 5550,3525 4762.5,3600 5587.5,3600 4575,3675 4650,3675 4575,3975 4650,3975 5325,3975 5400,3975 5475,3975 4837.5,4050 4575,4125 4650,4125 4950,4125 5250,4125 5625,4125 4612.5,4200 4687.5,4200 5587.5,4200 4575,4275 4650,4275 5025,4275 5625,4275 4987.5,4350 5062.5,4350 5025,4425 5625,4425 4987.5,4500 5587.5,4500 4650,4575 4725,4575 4800,4575 4987.5,4650 5062.5,4650 5137.5,4650 5362.5,4650
  other v4: 5342.9,4354.14 5248.41,4432.88 5342.9,4432.88
  other v5: 5327.72,4213.3 5235.85,4213.79 5174.57,4605.02 5624.82,4616.79 5667.58,4616.66 5210.36,4630.01 5174.57,4642.03 5666.27,4648.92 5625.08,4650.1 5174.57,4679.04 5501.4,4681.98 5545.73,4682.11 5586.52,4682.24 5626.4,4682.37 5664.17,4682.89 5210.87,4687.07
  other v6: 5476.6,2602.58 5504.29,2603.75 5457.28,2622.45 5514.82,2655.63 5515.81,2683.33 5508.44,2710.05 5465.32,2730.04 5508.44,2737.76 5465.32,2757.76 5508.44,2765.48 5465.32,2785.48 5364.16,2786.45 5391.88,2786.45 5508.44,2793.2 5415.08,2801.62 5442.79,2801.62 5507.5,2820.9 5489.41,2841.9 5434.13,2844.74 5461.84,2844.74 5407.55,2852.61 5351.23,2856.94 5102.04,2860.72 5129.75,2860.72 5157.47,2860.72 5185.19,2860.72 5212.9,2860.72 5240.62,2860.72 5268.33,2860.72 5296.05,2860.72 5323.77,2860.72 5074.66,2865.05 5391.56,2875.25 5056.26,2885.78 5124.39,2903.84 5152.11,2903.84 5207.54,2903.84 5235.26,2903.84 5262.97,2903.84 5290.69,2903.84 5318.41,2903.84 5096.74,2905.7 5053.67,2913.38 5053.88,2941.09 5054.08,2968.81 5071.23,3032.88
  other v8: 4859.23,3144.48 4899.51,3144.48 4939.79,3144.48 4980.08,3144.48 5020.36,3144.48 5060.65,3144.48 4861.39,3191.31 4901.67,3191.31 4941.96,3191.31 4982.24,3191.31 5022.53,3191.31 5062.81,3191.31 4862.72,3234.24 4903.01,3234.24 4943.29,3234.24 4983.58,3234.24 5023.86,3234.24 5064.15,3234.24 4861.26,3278.95 4901.55,3278.95 4941.83,3278.95 4982.11,3278.95 5022.4,3278.95 5062.68,3278.95 4860.66,3320.02 4896.28,3320.02 4941.23,3320.02 4981.52,3320.02 5021.8,3320.02 5062.09,3320.02
  other v11: 5300.7,3400.78 5332.2,3463.78 5269.2,3479.52
  other v12: 5407.57,4587.63 5408.15,4667.97
GREEN: D8.1 D8.3 U5.A4 U5.B5 | length 424.2
  L1_TOP w4: U5.A4@5253.46,3448.03 U5.B5@5269.2,3463.78
  L1_TOP w7: 5130.44,3651.64 5156.47,3677.67 5156.47,3685.92 v2(5157.65,3687.09)
  L1_TOP w7.87: 5130.44,3651.64 5130.44,3562.32 5244.73,3448.03 U5.A4@5253.46,3448.03
  L6_BOTTOM w4: D8.1@5140.13,3770.12 D8.1@5144.46,3765.79 ; D8.3@5144.46,3741.97 D8.3@5157.65,3728.78 D8.3@5151.34,3722.48
  L6_BOTTOM w10: D8.3@5144.46,3741.97 D8.1@5144.46,3765.79 ; D8.3@5151.34,3722.48 5157.65,3716.17 v2(5157.65,3687.09)
HSE_IN: C19.1 U6.35 XO1.1 | length 216
  L1_TOP w7.87: U6.35@5106.39,3114.66 5118.31,3114.66 5132.73,3100.24 5207.9,3100.24 5224.53,3116.87 5224.53,3117.03 5231.04,3123.54 XO1.1@5247.28,3123.54 ; XO1.1@5241.38,3124.88 5250.38,3124.88 5258.22,3117.03 5258.22,3115.06 5260.75,3112.53 C19.1@5294.54,3112.53
HSE_OUT: C20.1 U6.34 XO1.3 | length 153.7
  L1_TOP w7.87: U6.34@5077.96,3086.24 5133.98,3086.24 5140.35,3079.88 5176.02,3079.88 5183.87,3072.03 C20.1@5183.87,3030.14
I2C1_SCL: R31.1 U1.D8 U4.4 U6.66 U8.4 | length 2560.4
  L1_TOP w7.87: R31.1@4737.12,3622.14 4738.3,3620.97 v2(4781.17,3620.97) ; v2(4840.6,3627.46) v2@4838.83,3629.23 ; U6.66@4857.49,3395.05 4857.49,3426.86 ; v2(4870.97,3449.25) 4857.49,3435.77 4857.49,3426.86 ; v10(4922.84,3894.31) 4922.18,3893.65 4909.14,3893.65 4862.39,3846.9 4862.39,3652.79 v2@4838.83,3629.23 ; v10(4983.24,3899.41) 4994.36,3910.52 5094.86,3910.52 5108.73,3896.65 5199.51,3896.65 5294.44,3991.58 5294.44,4248.07 5295.66,4249.29 U1.D8@5295.66,4338.39 ; U4.4@5497.36,3193.59 5497.36,3307.55 5499.89,3310.08 5532.23,3310.08 v2(5532.62,3309.68) ; v2@4838.83,3629.23 4837.06,3627.46 4837.06,3544.64 4829.8,3537.38 4829.8,3454.55 4857.49,3426.86
  L3_Signal w7.87: v2(4870.97,3449.25) 4870.97,3356.31 4970.9,3356.31 5002.35,3324.87 5002.35,3313.79 5015.66,3300.48 5026.55,3300.48 5042.54,3284.49 5042.54,3273.41 5055.16,3260.79 5063.28,3260.79 5157.67,3166.4 5418.2,3166.4 5443.19,3191.39 5443.19,3235.77 5516.07,3308.64 5531.58,3308.64 v2(5532.62,3309.68)
  L6_BOTTOM w7.87: v2(4781.17,3620.97) 4831.54,3620.97 4838.04,3627.46 v2(4840.6,3627.46) ; v10(4922.84,3894.31) 4924.87,3894.31 4928.53,3897.98 4981.81,3897.98 v10(4983.24,3899.41) ; U8.4@5521.65,3304.51 5521.65,3305.49 5525.4,3309.24 5532.18,3309.24 v2(5532.62,3309.68)
I2C1_SDA: R32.1 U1.E8 U4.2 U6.67 U8.3 | length 2689.3
  L1_TOP w7.87: R32.1@4738.35,3565.36 4738.35,3565.17 4749.96,3553.55 4803.08,3553.55 4805.13,3555.61 ; U6.67@4841.74,3395.05 4841.74,3428.06 4805.13,3464.67 4805.13,3555.61 ; v10(4920.74,3916.63) 4919.67,3916.63 4909.49,3906.45 4900.31,3906.45 4848.78,3854.92 4848.78,3680.39 4825.48,3657.09 4825.48,3608.81 v2(4805.13,3588.46) 4805.13,3555.61 ; v10(4980.82,3923.17) 5184.07,3923.17 5279.91,4019.01 U1.E8@5279.91,4338.39 ; U4.2@5536.73,3193.59 5539.29,3196.15 5539.29,3201.6 5553.88,3216.19 v2(5594.01,3216.19)
  L3_Signal w7.87: v2(4805.13,3588.46) 4818.53,3588.46 4880.94,3526.05 4893.06,3526.05 4937.27,3481.84 4942.49,3481.84 5039.96,3384.37 5039.96,3316.46 5059.31,3297.11 5075.23,3297.11 5101.28,3271.05 5101.28,3252.69 5174.5,3179.47 5384.14,3179.47 5409.66,3204.98 5409.66,3258.9 5450.76,3300 5460.67,3300 5470.47,3309.8 5470.47,3317.21 5486.69,3333.42 5538.31,3333.42 v2(5538.43,3333.55)
  L6_BOTTOM w5: 5570.94,3333.42 5582.14,3322.23 5582.14,3294.95 5594.01,3283.09
  L6_BOTTOM w7.87: v10(4920.74,3916.63) 4921.49,3915.88 4923.84,3915.88 4923.98,3915.74 4972.33,3915.74 4979.76,3923.17 v10(4980.82,3923.17) ; U8.3@5521.65,3330.1 5521.95,3329.8 v2@5538.63,3329.8 ; v2(5538.43,3333.55) 5538.43,3329.99 v2@5538.63,3329.8 ; 5570.94,3333.42 5542.25,3333.42 v2@5538.63,3329.8 ; v2(5594.01,3216.19) 5594.01,3283.09
IMPIN: R34.2 U5.D6 | length 441.5
  L1_TOP w4: U5.D6@5301.62,3479.52 5312.11,3490.01 5320.58,3490.01 5332.54,3501.96 5346.28,3501.96 5369.51,3525.19 5384.46,3525.19
  L1_TOP w5: 5384.46,3525.19 5403.94,3544.68 5403.94,3545.16
  L1_TOP w7.87: U5.D6@5300.7,3479.52 U5.D6@5301.62,3479.52 ; 5403.94,3545.16 5404.18,3545.4 5404.18,3816.41 5431.04,3843.26 R34.2@5431.04,3844.76
IMPIP: R25.2 U5.C6 | length 539.8
  L1_TOP w4: U5.C6@5284.95,3479.52 5302.87,3497.45 5307.79,3497.45 ; 5308.66,3498.32 5319.46,3498.32 5331.41,3510.27 5343.87,3510.27 5348.14,3514.55 5366.56,3532.97
  L1_TOP w7.87: 5307.79,3497.45 5308.66,3498.32 ; 5366.56,3532.97 5366.56,3554.99 5381.61,3570.04 5381.61,3892.63 5430.18,3941.2 R25.2@5430.18,3942.7
INT: R8.1 U1.G6 U6.64 | length 1265
  L1_TOP w5: 5132.95,4373.22 5204.22,4373.22 5204.99,4372.45 U1.G6@5244.13,4372.45
  L1_TOP w7.87: U6.64@4888.99,3395.05 4889.31,3395.37 4889.31,3429.32 4898.24,3438.25 v2(4898.24,3439.27) ; v1(4977.68,4274.25) 4997.86,4294.43 5033.25,4294.43 5093.66,4354.84 R8.1@5093.66,4384.43 ; R8.1@5093.66,4384.63 R8.1@5093.66,4384.43 ; 5132.95,4373.22 5121.74,4384.43 R8.1@5093.66,4384.43 ; U1.G6@5244.13,4372.45 5245.1,4372.45 5247.67,4369.89 U1.G6@5248.41,4369.89
  L6_BOTTOM w7.87: v2(4898.24,3439.27) 4889.88,3447.63 4889.88,4008.47 4930.23,4048.82 4930.23,4199.67 4980.31,4249.76 4980.31,4258.87 4980.24,4258.94 4980.24,4271.68 v1(4977.68,4274.25)
IR: D9.4 U5.A5 | length 394.6
  L1_TOP w7.87: v2(5159.65,3657.59) 5158.46,3656.4 5158.46,3586.19 5178.89,3565.77 5178.89,3529.1 5244.21,3463.78 U5.A5@5253.46,3463.78
  L6_BOTTOM w6: D9.4@5062.71,3765.9 D9.4@5063.4,3765.2
  L6_BOTTOM w7.87: D9.4@5063.4,3765.2 5063.4,3750.87 5078.52,3735.75 5090.55,3735.75 5125.64,3700.66 5125.64,3691.6 v2(5159.65,3657.59)
ISET: ISET.1 R7.2 U1.B4 | length 253.6
  L1_TOP w4: ISET.1@5499.74,4490.46 ISET.1@5502.82,4490.46
  L1_TOP w7.87: v2(5466.9,4464.99) 5468.4,4464.99 5493.87,4490.46 ISET.1@5499.74,4490.46
  L3_Signal w7: v4(5327.16,4401.42) v7@5327.7,4400.84
  L3_Signal w7.87: v4(5327.16,4401.42) 5328.08,4400.49 5328.08,4394.76 5337.06,4385.78 5382.27,4385.78 v2@5383.26,4384.79 ; v2(5384.31,4385.78) 5386,4385.78 5465.21,4464.99 v2(5466.9,4464.99)
  L6_BOTTOM w7: R7.2@5360.13,4384.73 5361.19,4385.78 v2(5384.31,4385.78)
  other v7: 5327.16,4401.42
L3OUT: C15.1 L3.1 U1.A6 | length 271.9
  L1_TOP w7: U1.A6@5342.9,4369.89 5404.13,4369.89 5411.06,4376.82 C15.1@5411.06,4377.21
  L1_TOP w15: C15.1@5411.06,4377.21 5413.99,4374.27 5413.99,4363.2 5432.46,4344.73 L3.1@5591.63,4344.73
LSE_IN: C45.1 U6.3 XO2.1 | length 176.6
  L1_TOP w7.87: C45.1@4638.18,3374.65 4708.98,3374.65 XO2.1@4709.98,3375.65 4719.48,3375.65 4759.99,3335.14 U6.3@4797.57,3335.14
LSE_OUT: C46.1 U6.4 XO2.2 | length 160.5
  L1_TOP w7.87: C46.1@4637.18,3318.65 4708.98,3318.65 XO2.2@4709.98,3319.65 ; XO2.2@4710.24,3319.39 U6.4@4797.57,3319.39
MCU_RF: U6.31 U7.3 | length 78.8
  L1_TOP w7.87: U7.3@5015.67,3013.68 5025.13,3023.13 5025.13,3054.38 5030.72,3059.97 U6.31@5030.72,3086.24
NetAE1_2: AE1.2 L6.1 | length 63.4
  L1_TOP w7.87: L6.1@5518.38,2628.3 5522.82,2628.3 5533.57,2617.55 AE1.2@5577.29,2617.55
NetC21_1: C21.1 R17.1 | length 52.8
  L1_TOP w7.87: R17.1@5494.99,4024.98 5499.14,4020.83 C21.1@5546.05,4020.83
NetC22_1: C22.1 R25.1 | length 52.8
  L1_TOP w7.87: R25.1@5496.52,3927.35 5500.68,3923.2 C22.1@5547.58,3923.2
NetC23_1: C23.1 U5.E3 | length 127.6
  L1_TOP w4: C23.1@5384.79,3386.1 C23.1@5387.2,3383.69
  L1_TOP w10: v1(5362.74,3386.43) 5364.11,3385.06 5383.75,3385.06 C23.1@5384.79,3386.1
  L3_Signal w10: v7(5316.26,3432.2) 5316.73,3432.67 5316.73,3446.01 5318.65,3447.93 v9(5318.65,3448.42)
  L4_PWR w10: v9(5318.65,3448.42) 5318.99,3448.07 5325.23,3448.07 5362.74,3410.57 v1(5362.74,3386.43)
  other v4: 5316.26,3432.2
NetC24_1: C24.1 U5.F4 | length 61.7
  L1_TOP w7.87: U5.F4@5332.2,3448.03 5348.74,3448.03 5365.25,3464.55 C24.1@5387.02,3464.55
NetC25_1: C25.1 R34.1 | length 52.8
  L1_TOP w7.87: R34.1@5497.38,3829.42 5501.54,3825.26 C25.1@5548.44,3825.26
NetC27_1: C27.1 R39.1 | length 75.4
  L1_TOP w7.87: R39.1@5483.96,3742.78 5483.96,3741.28 5497.81,3727.43 5499.31,3727.43 5503.46,3723.28 C27.1@5550.37,3723.28
NetC41_1: C41.1 FB5.2 U6.13 U6.14 | length 194.6
  L1_TOP w7: 4742.54,3161.91 U6.14@4797.57,3161.91
  L1_TOP w7.87: v1(4725.39,3179.13) v1@4727.31,3177.22 ; C41.1@4727.31,3152.1 C41.1@4729.33,3150.08 C41.1@4730.71,3150.08
  L1_TOP w10: C41.1@4727.31,3152.1 v1@4727.31,3177.22 ; C41.1@4730.71,3150.08 4742.54,3161.91 ; U6.14@4797.57,3161.91 U6.13@4797.57,3177.66
  L6_BOTTOM w10: v1(4725.39,3179.13) 4751.97,3152.56 FB5.2@4751.97,3115.15
NetC64_1: C64.1 U1.E3 | length 99
  L3_Signal w4: v2(5236.44,4489.5) 5237.51,4488.44 5249.33,4488.44 5279.91,4457.86 v7@5279.91,4417.13
  L6_BOTTOM w4: v2(5236.44,4489.5) 5236.44,4489.95 C64.1@5237.32,4490.83
  other v4: 5279.97,4417.1
  other v7: 5279.97,4417.1
NetCR1_1: CR1.1 U6.53 | length 942
  L1_TOP w7.87: CR1.1@5004.92,4160.43 5037.4,4160.43 5042.45,4155.38 5042.45,4094.49 4949.42,4001.46 4949.42,4000.24 4945.28,3996.11 4945.28,3891.73 4944.86,3891.31 4944.86,3867.64 4935.4,3858.19 4935.4,3672.61 4940.1,3667.91 4940.1,3657.9 5102.55,3495.44 5102.55,3443.08 5096.19,3436.71 5076.04,3436.71 5062.3,3422.98 5062.3,3409.19 5062.3,3395.14 U6.53@5062.22,3395.05
NetCR1_3: CR1.3 U6.52 | length 1019.6
  L1_TOP w7.87: CR1.3@5004.92,4235.24 5012.8,4227.36 5038.75,4227.36 5046.35,4219.76 5046.35,4181.66 5058.18,4169.83 5058.18,4155.7 5058.02,4155.54 5058.02,4088.04 4960,3990.02 4960,3885.64 4959.57,3885.21 4959.57,3860.34 4950.97,3851.74 4950.97,3669.04 5118.12,3501.89 5118.12,3436.63 5102.63,3421.14 5082.48,3421.14 5077.87,3416.53 U6.52@5077.87,3409.19 ; U6.52@5077.88,3409.19 5077.88,3395.14 U6.52@5077.96,3395.05
NetD1_1: D1.1 J2.2 R4.2 R5.2 | length 269.7
  L1_TOP w20: J2.2@4571.87,4639.54 4583.5,4639.54 4605.38,4661.42 D1.1@4657.48,4661.42 4657.58,4661.32 R5.2@4721.36,4661.32 ; R5.2@4724.62,4662.4 4775.42,4662.4 4778.04,4659.77 R4.2@4834.64,4659.77
NetD13_1: D13.1 R22.2 | length 97.8
  L1_TOP w7.87: D13.1@5352.48,3051.36 D13.1@5361.8,3060.69
  L1_TOP w10: R22.2@5359.73,2987.92 5359.73,3058.62 D13.1@5361.8,3060.69 ; D13.1@5360.49,3060.69 D13.1@5360.49,3071.64
NetJ1_02: J1.02 U6.54 | length 771.1
  L1_TOP w4: 5064.92,3440.56 5064.92,3475.3
  L1_TOP w5: 5064.64,3475.58 5064.64,3502.11
  L1_TOP w7.87: J1.02@4755.51,3928.4 4757.26,3926.66 v1(4835.33,3926.66) ; v2(4874.78,3595.8) 4875.42,3596.44 4970.3,3596.44 5064.64,3502.11 ; U6.54@5046.47,3395.05 5046.47,3422.11 5064.92,3440.56
  L6_BOTTOM w7.87: v1(4835.33,3926.66) 4874.27,3887.71 4874.27,3617.9 ; v2(4874.78,3595.8) 4874.78,3617.9
NetJ1_04: J1.04 U6.56 | length 697.4
  L1_TOP w7.87: J1.04@4755.51,3878.4 4757,3876.91 v1(4829.75,3876.91) ; v2(4874.29,3574.96) 4874.57,3575.24 4972.96,3575.24 5015.69,3532.51 5015.69,3395.77 U6.56@5014.97,3395.05
  L6_BOTTOM w7.87: v1(4829.75,3876.91) 4841.63,3865.04 4850.35,3865.04 4859.67,3855.72 4859.67,3589.54 v2@4874.25,3574.96
NetJ1_06: J1.06 U6.63 | length 607.6
  L1_TOP w7.87: J1.06@4755.51,3828.4 4823.18,3828.4 4832.19,3819.4 4832.19,3690.01 4796.28,3654.1 4796.28,3614.71 4783.85,3602.27 4783.85,3590.42 v2(4782.34,3588.92) ; v2(4853.82,3478.62) 4882.02,3478.62 4913.35,3447.3 4913.35,3433.02 4904.74,3424.4 U6.63@4904.74,3395.05
  L6_BOTTOM w7.87: v2(4782.34,3588.92) 4781.54,3588.11 4781.54,3538.62 4840.47,3479.69 4852.75,3479.69 v2(4853.82,3478.62)